# EAGLE board mini_6_cpxsq (EAGLE 6.0)

Size 25.4 x 25.4 mm. Coordinates in mm from the lower left corner, seen from the top.
Outline: 0,0 0,25.4 25.4,25.4 25.4,0 0,0
Copper layers (1*16): Top 0.035mm / dielectric 1.5mm / Bottom 0.035mm
Design rules: minimum track width 10mil, minimum drill 24mil, track to track 8mil, track to pad 8mil, pad to pad 8mil, via to via 8mil, smd to smd 8mil, copper to edge 40mil, drill to drill 8mil, minimum pad ring 10mil, minimum via ring 8mil, stop-mask expansion 4mil, vias tented up to drill 0mil, thermal gap 10mil
Holes 3.2 mm at 5.08,20.32 20.32,20.32

## Footprints (pad centres in the part's own frame; a part is rotated, then mirrored left to right if it is on the bottom)
LED3MM = drill 0.813 octagon: A -1.27,0; K 1.27,0
1X01 = drill 1.016 octagon: 1 0,0

## Placement (x,y rotation side)
00  [LED3MM]  2.54,2.54 0 top
01  [LED3MM]  7.62,2.54 0 top
02  [LED3MM]  12.7,2.54 0 top
03  [LED3MM]  17.78,2.54 0 top
04  [LED3MM]  22.86,2.54 0 top
10  [LED3MM]  2.54,7.62 0 top
11  [LED3MM]  7.62,7.62 0 top
12  [LED3MM]  12.7,7.62 0 top
13  [LED3MM]  17.78,7.62 0 top
14  [LED3MM]  22.86,7.62 0 top
20  [LED3MM]  2.54,12.7 0 top
21  [LED3MM]  7.62,12.7 0 top
22  [LED3MM]  12.7,12.7 0 top
23  [LED3MM]  17.78,12.7 0 top
24  [LED3MM]  22.86,12.7 0 top
30  [LED3MM]  2.54,17.78 0 top
31  [LED3MM]  7.62,17.78 0 top
32  [LED3MM]  12.7,17.78 0 top
33  [LED3MM]  17.78,17.78 0 top
34  [LED3MM]  22.86,17.78 0 top
40  [LED3MM]  2.54,22.86 0 top
41  [LED3MM]  7.62,22.86 0 top
42  [LED3MM]  12.7,22.86 0 top
43  [LED3MM]  17.78,22.86 0 top
44  [LED3MM]  22.86,22.86 0 top
H0  [1X01]  6.35,5.08 0 top
H1  [1X01]  8.89,5.08 0 top
H2  [1X01]  11.43,5.08 0 top
H3  [1X01]  13.97,5.08 0 top
H4  [1X01]  16.51,5.08 0 top
H5  [1X01]  19.05,5.08 0 top

## Library data of the parts
00 01-04 10-14 20-24 30-34 40-44 = led
H0 H1-H5 = pinhead

## Nets
D: 00.A 11.A 22.A 33.A 44.A H5.1
S0: 00.K 01.A 02.A 03.A 04.A 10.K 20.K 30.K 40.K H0.1
S1: 01.K 10.A 11.K 12.A 13.A 14.A 21.K 31.K 41.K H1.1
S2: 02.K 12.K 20.A 21.A 22.K 23.A 24.A 32.K 42.K H2.1
S3: 03.K 13.K 23.K 30.A 31.A 32.A 33.K 34.A 43.K H3.1
S4: 04.K 14.K 24.K 34.K 40.A 41.A 42.A 43.A 44.K H4.1

## Tracks (layer width: path | path; a pad name or v marks a point on that pad's centre or on a via)
D  (5 unrouted)
S0  (9 unrouted)
S1  (9 unrouted)
S2  (9 unrouted)
S3  (9 unrouted)
S4  (9 unrouted)